# Altium PCB Copy of PCB.PcbDoc
Units mil, origin at the board's own origin, x right, y up, seen from the top; angles counter-clockwise.
Board outline 2615 x 3200 mil, 2 copper layers (Top Layer, Bottom Layer), stack 61.756 mil thick; 29 components, 50 nets, 138 pads, 10 vias.
Unrouted connection lines stored in the file: 13.
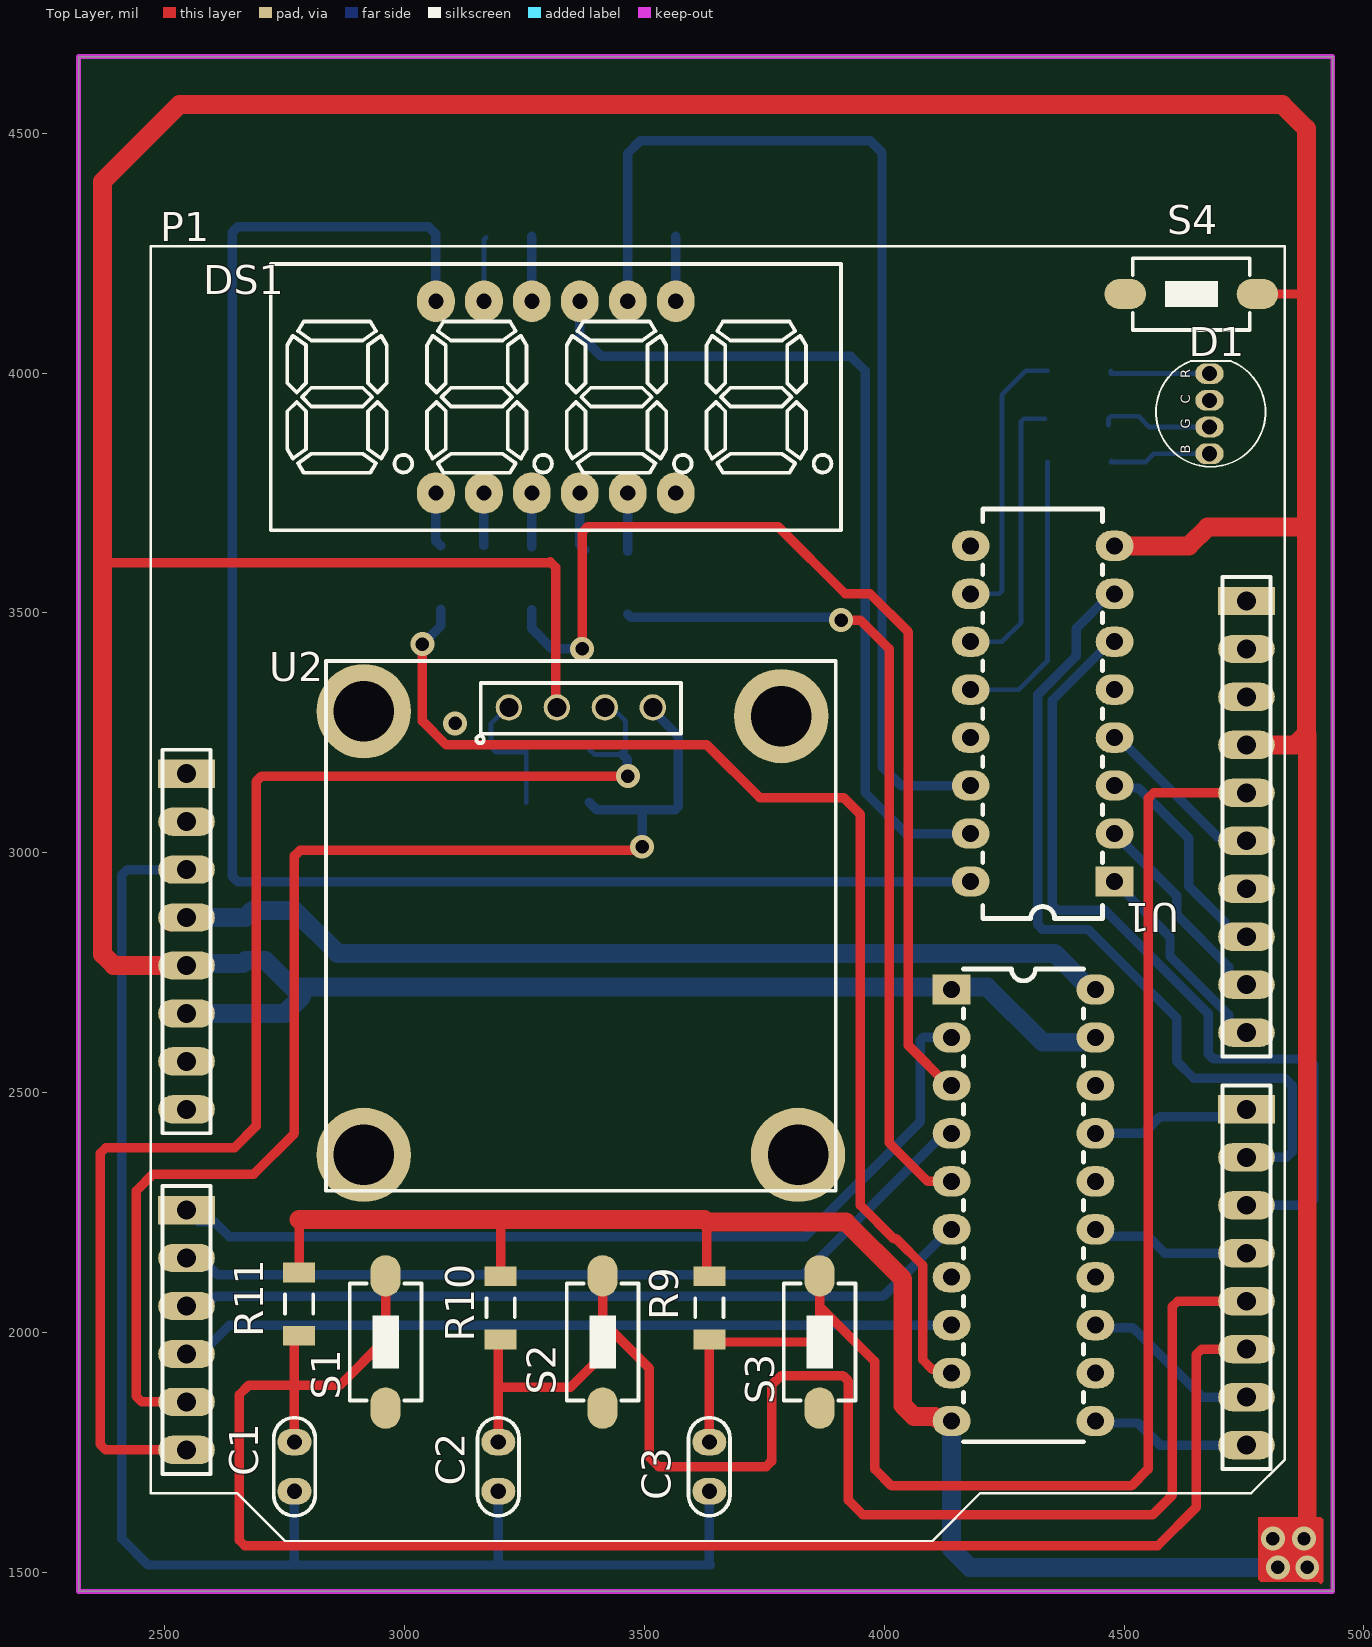
[diagram p0: Top Layer view]
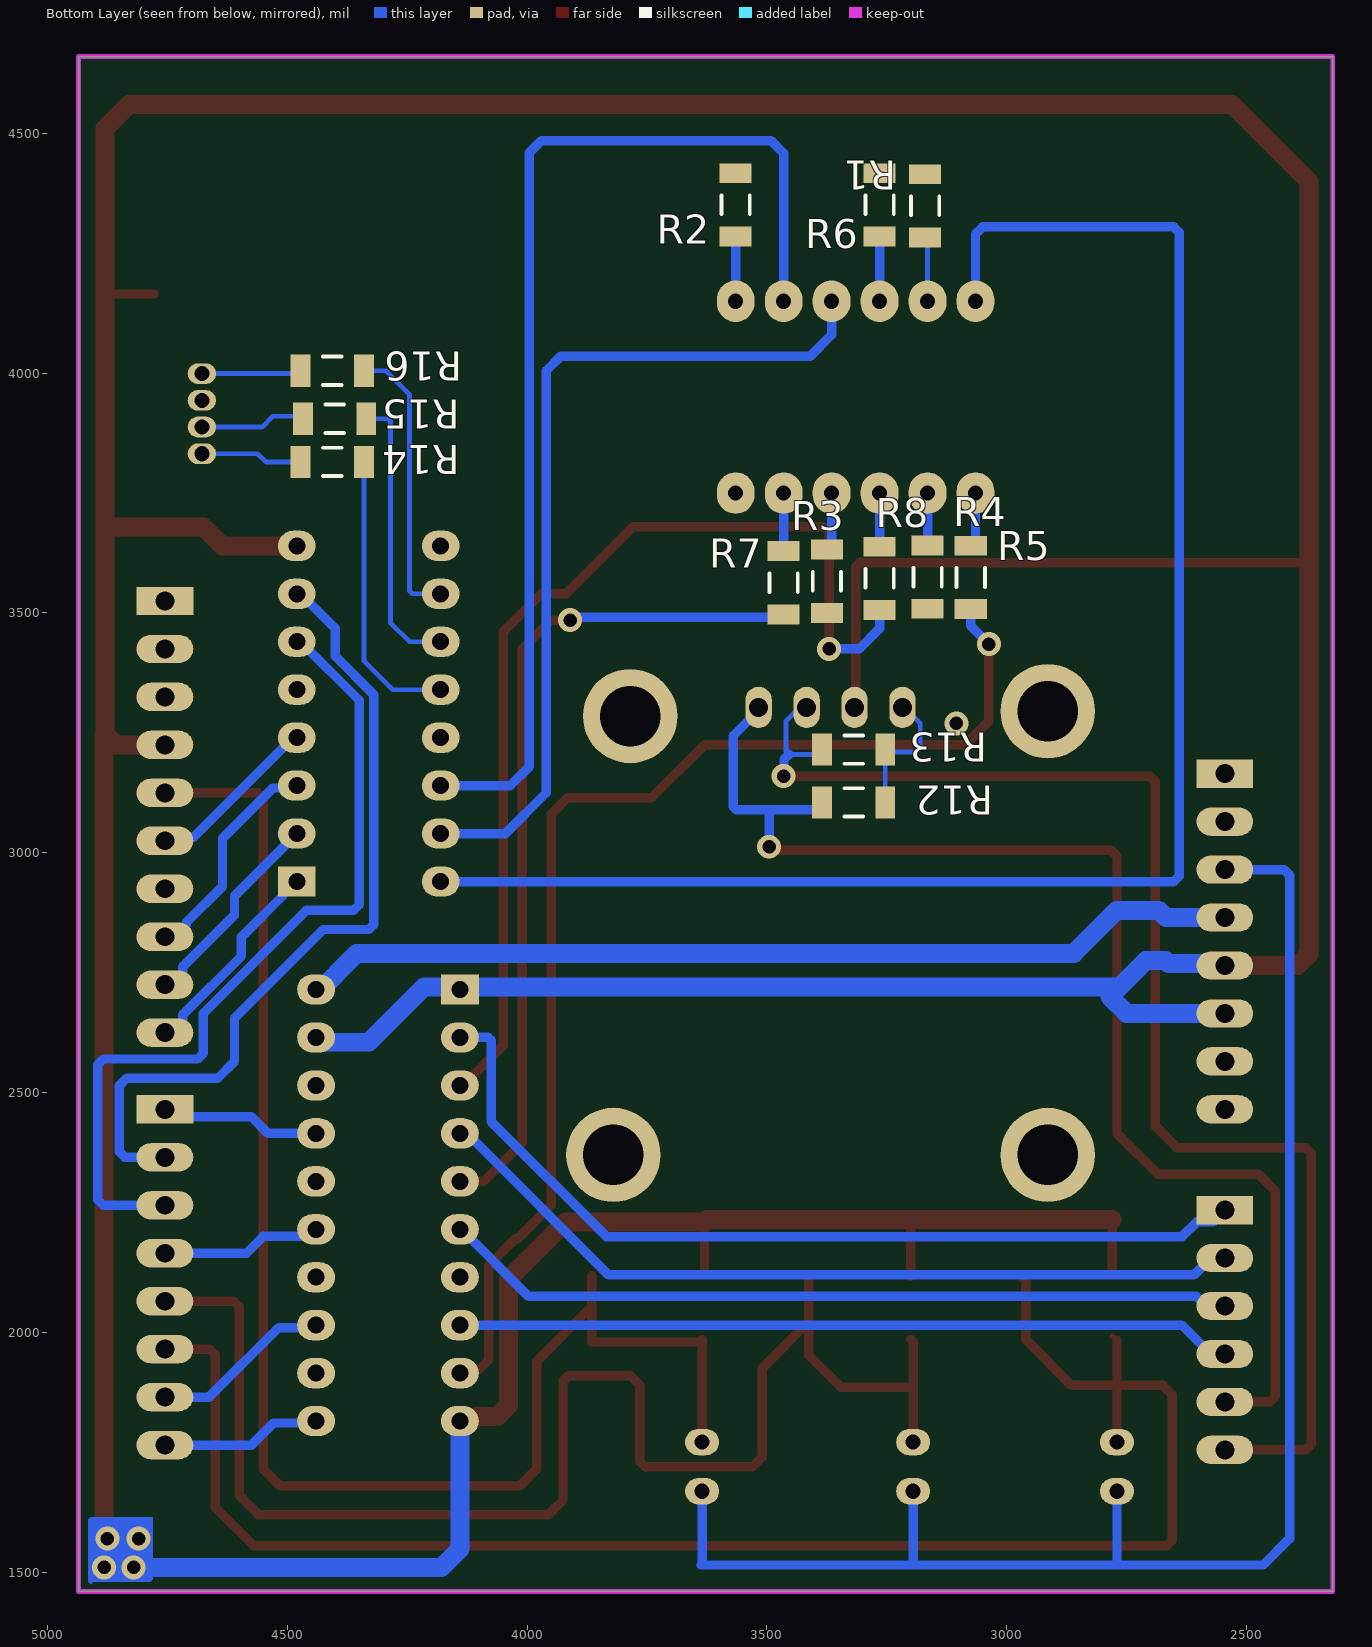
[diagram p1: Bottom Layer view, seen from below]

## Layer stack, top to bottom
Top Solder: solder mask 1, SM-001, Dk 4
Top Layer: signal copper 1.378
Dielectric 1: core 59, Core-043, Dk 4.3
Bottom Layer: signal copper 1.378
Bottom Solder: solder mask 1, SM-001, Dk 4

## Board outline
2320,1460 4935,1460 4935,4660 2320,4660

## Design rules (kind name [scope] priority, off if disabled: settings)
Clearance [All] p1: gap=10 ignorepadtopadclearanceinfootprint=FALSE except(0: Arc-Hole Track-Hole SMDPad-Hole THPad-Hole Via-Hole Fill-Hole Poly-Hole Region-Hole Text-Hole)
PolygonConnect [All] p1: connectstyle=Relief reliefconductorwidth=10 reliefentries=4 polygonreliefangle="90 Angle" airgapwidth=10
RoomDefinition Sheet [InComponentClass('Sheet')] p1: confinementstyle=ConfineIn formatcopy=TRUE lockcomponents=FALSE outline 7045,1060 15695,1060 15695,4125 7045,4125
RoutingVias [All] p1: holewidth=28 width=50 viastyle="Through Hole" minholewidth=28 minwidth=50 maxholewidth=28 maxwidth=50
SolderMaskExpansion [All] p1: expansion=4 istentingtop=FALSE
Width [All] p1: maxlimit=100 minlimit=10 preferedwidth=10
30 further rules are at their usual default settings.

## Classes and differential pairs
component class Sheet: C3 D1 DS1 P1 R1 R2 R3 R4 R5 R6 R7 R8 R9 R10 R11 R12 R13 R14 S1 S2 S3 S4

## Components (designator, comment, footprint, x,y, rotation, side; value= is the part's Value field where it differs from the comment)
C1 "100nF" C_CER_D5 2770,1720 r90 top
C2 "100nF" C_CER_D5 3195,1720 r90 top
C3 "100nF" C_CER_D5 3635,1720 r90 top
D1 "RGB" RGB_DIP 4680,3915 r90 top locked
DS1 "4Digit, Red" 7Seg-MPX4-30.2x14.1mm 3315,3950 r0 top
P1 "UNO" Arduino_uno_U_1 3635,2825 r0 top locked
R1 "470" "RES 1206 (3216X08L)" 3170,4400 r270 bottom value=Value?
R2 "470" "RES 1206 (3216X08L)" 3565,4402.05 r270 bottom value=Value?
R3 "470" "RES 1206 (3216X08L)" 3375,3515 r90 bottom value=Value?
R4 "470" "RES 1206 (3216X08L)" 3165,3523.64 r90 bottom value=Value?
R5 "470" "RES 1206 (3216X08L)" 3075,3522.95 r90 bottom value=Value?
R6 "470" "RES 1206 (3216X08L)" 3265,4402.05 r270 bottom
R7 "470" "RES 1206 (3216X08L)" 3465,3511.95 r90 bottom
R8 "470" "RES 1206 (3216X08L)" 3265,3521.18 r90 bottom
R9 "4.7k" "RES 1206 (3216X08L)" 3635,2000 r90 top
R10 "4.7k" "RES 1206 (3216X08L)" 3200,2000 r90 top
R11 "4.7k" "RES 1206 (3216X08L)" 2779.78,2007.95 r90 top
R12 "4.7k" "RES 1206 (3216X08L)" 3267.95,3105 r0 bottom
R13 "4.7k" "RES 1206 (3216X08L)" 3267.95,3215 r0 bottom
R14 "470" "RES 1206 (3216X08L)" 4355,3815 r0 bottom
R15 "470" "RES 1206 (3216X08L)" 4350,3905 r0 bottom
R16 "470" "RES 1206 (3216X08L)" 4355,4005 r0 bottom
S1 "PB" SW_PB_SMD_2PIN_SPST_6X3X2 2960,1980 r90 top
S2 "PB" SW_PB_SMD_2PIN_SPST_6X3X2 3412.5,1980 r90 top
S3 "PB" SW_PB_SMD_2PIN_SPST_6X3X2 3865,1980 r90 top
S4 "PB" SW_PB_SMD_2PIN_SPST_6X3X2 4640,4165 r180 top locked
U1 "ULN2003" CDIP16 4330,3290 r180 top locked
U2 "OLED_SSD1306" OLED_SSD1306_64_I2C 3367.24,3303.07 r0 top locked
? "74HCT244" PDIP20 4290,2265 r0 top locked

## Footprints (in the part's own frame and the unit in brackets; to place one, negate y for a bottom-side part, rotate by r counter-clockwise, add the part's x,y. Pads: shape width x height; smd on the part's side, far side on the other; paste and mask are expansions set on the pad)
7Seg-MPX4-30.2x14.1mm [mm] "Display, 12-Leads, Body 30/2x14/1mm"
  oval 2x2.2 hole 0.8: 1(-6.35,-5.08) 2(-3.81,-5.08) 3(-1.27,-5.08) 4(1.27,-5.08) 5(3.81,-5.08) 6(6.35,-5.08) 7(6.35,5.08) 8(3.81,5.08) 9(1.27,5.08) 10(-1.27,5.08) 11(-3.81,5.08) 12(-6.35,5.08)
  silkscreen extent -15.1,-7.05 15.1,7.05, body extent -15,-7 15,7, height 7.1
Arduino_uno_U_1 [mm]
  rect 3x1.5 hole 1: 1(-27.686,8.636) 9(-27.686,-14.478) 22(28.448,-9.144) 32(28.448,17.78)
  oval 3x1.5 hole 1: 2(-27.686,6.096) 3(-27.686,3.556) 4(-27.686,1.016) 5(-27.686,-1.524) 6(-27.686,-4.064) 7(-27.686,-6.604) 8(-27.686,-9.144) 10(-27.686,-17.018) 11(-27.686,-19.558) 12(-27.686,-22.098) 13(-27.686,-24.638) 14(-27.686,-27.178) 15(28.448,-26.924) 16(28.448,-24.384) 17(28.448,-21.844) 18(28.448,-19.304) 19(28.448,-16.764) 20(28.448,-14.224) 21(28.448,-11.684) 23(28.448,-5.08) 24(28.448,-2.54) 25(28.448,0) 26(28.448,2.54) 27(28.448,5.08) 28(28.448,7.62) 29(28.448,10.16) 30(28.448,12.7) 31(28.448,15.24)
  silkscreen extent -29.59,-32 30.48,36.58, body extent -28.96,-28.31 29.72,19.05, height 8.51
C_CER_D5 [mm] "CAP, CER, D:5mm, pitch: 2.5mm"
  oval 1.4x1.8 hole 0.8: 1(-1.3,0) 2(1.3,0)
  silkscreen extent -2.6,-1.1 2.6,1.1, body extent -2.46,-1 2.46,1, height 5.45
CDIP16 [mm] "16-Pin Ceramic DIP (DD16) NARROW_(300mil width) - 100mil pitch"
  rect 2x1.6 hole 0.9: 1(-3.81,8.89)
  oval 2x1.6 hole 0.9: 2(-3.81,6.35) 3(-3.81,3.81) 4(-3.81,1.27) 5(-3.81,-1.27) 6(-3.81,-3.81) 7(-3.81,-6.35) 8(-3.81,-8.89) 9(3.81,-8.89) 10(3.81,-6.35) 11(3.81,-3.81) 12(3.81,-1.27) 13(3.81,1.27) 14(3.81,3.81) 15(3.81,6.35) 16(3.81,8.89)
  silkscreen extent -3.18,-10.85 3.18,10.85, body extent -3.93,-10.79 3.94,10.79, height 4
OLED_SSD1306_64_I2C [mm] "OLED SS1306 Breakout, 128X64, I2C"
  round 1.4 / inner round 1.4 / far side oval 1.4x2.2 hole 1 mask+0.1: 1(-3.81,0) 2(-1.27,0) 3(1.27,0) 4(3.81,0)
  round 5 hole 3.2: ""(-11.5,-23.7) ""(-11.5,-0.2) ""(10.611,-0.459) ""(11.5,-23.7)
  silkscreen extent -13.5,-25.6 13.5,2.46, body extent -13.08,-25.74 13.62,2.12, height 13.97
PDIP20 [mm] "20-Pin Plastic DIP (DD20) NARROW_(300mil width) - 100mil pitch"
  rect 2x1.6 hole 0.9: 1(-3.81,11.43)
  oval 2x1.6 hole 0.9: 2(-3.81,8.89) 3(-3.81,6.35) 4(-3.81,3.81) 5(-3.81,1.27) 6(-3.81,-1.27) 7(-3.81,-3.81) 8(-3.81,-6.35) 9(-3.81,-8.89) 10(-3.81,-11.43) 11(3.81,-11.43) 12(3.81,-8.89) 13(3.81,-6.35) 14(3.81,-3.81) 15(3.81,-1.27) 16(3.81,1.27) 17(3.81,3.81) 18(3.81,6.35) 19(3.81,8.89) 20(3.81,11.43)
  silkscreen extent -3.17,-12.52 3.17,12.52, body extent -3.94,-12.51 3.94,12.51, height 3.76
"RES 1206 (3216X08L)" [mm] "Chip Resistor, 2-Leads, Body 3.2x1.6mm, IPC High Density _ (0.125 W)"
  rect 1.05x1.7 smd: 1(-0.377,0) 2(2.973,0)
  silkscreen extent 0.8,-0.75 1.8,0.75, body extent -0.23,-0.76 2.82,0.76, height 0.6
RGB_DIP [mm]
  oval 1.1x1.5 hole 0.8: 1(2.134,0.051) 2(0.72,0.051) 3(-0.694,0.051) 4(-2.108,0.051)
  silkscreen extent -2.8,-2.91 2.8,2.89, body extent -3,-3 2.6,3, height 8.09
SW_PB_SMD_2PIN_SPST_6X3X2 [mm] "SWITCH, PUSHBUTTON, SMD, SPST, 6X3.5X2.5mm, RS-282G05A3, SKQYPA, 50000 Cycles"
  oval 2.2x1.6 smd mask+0.1: 1(-3.5,0) 2(3.5,0)
  silkscreen extent -3.1,-1.9 3.1,1.9, body extent -3.4,-1.86 3.4,1.86, height 2.5

## Part data
C1 C2 C3: library part CAP_THD_CERML, "CAP, THD, CER MULTI LAYER,", ASSEMBLY=ASSEMBLY, DESC="CAP, CER MULTI LAYER,", MANF=MANF, MANF_P#=MANF_PART#, PARAM=50V, PARAM2=PARAM2, PRICE="100= 1$"
D1: library part Semi_LED_RGB_THT, "SMD 5050 LED RGB and Other", Package=Dip, Rating=5V, Inflow=5139, Type=CA, Validation=Valid
DS1: library part ModSen_7Seg_MPX4_Red_CA, "7Segment-MPX4-CA", Package=Package?, Rating=Rating?, Inflow=8134, Type=Type?, Validation=NT
P1: library part Con_Arduino_UNO_U, "Arduino uno up", Package=Package?, Rating=Rating?, Inflow=inflow?, Type=Type?, Validation=Valid
R1 R2 R3 R4 R5 R6 R7 R8 R9 R10 R11 R12 R13 R14 R15 R16: library part Res_SMD_1206, "Resistor", Package=1206, Rating=0.25W, Inflow=inflow?, Type=10%, Validation=Valid
S1 S2 S3 S4: library part SW_PushButton_2_SMD, "SMT Tactile ‎Switch", Package=SMD, Rating=2b, Inflow=8260, Type=Vertical, Validation=Valid
U1: library part IC_Driver_ULN2003, "Seven darlington array drivers", Package=SO-16, Rating=Rating?, Inflow=1506, Type=Driver, Validation=Valid
U2: library part OLED_SSD1306_64_I2C, "OLED, SSD1306, 0.96\", 128X64, BREAKOUT I2C", MANF=-, MANF_P#=OLED_SSD1306_I2C, PARAM="2 Colors, 0.96\", 128X64", PARAM2="3.3/5VCC, -20~70oC"
?: library part IC_Logic_74HCT244, "Octal Bus Buffer with 3 State Outputs (Non Inverted)", Package=Dip, Rating=8b, Inflow=1118, Type="3-State Non-Inverting", Validation=NT

## Via types
v1: diameter 50, hole 28, Top Layer to Bottom Layer, 10 vias

## Nets (pads, with @x,y where several pads share a name; then routed paths per layer and width w, separated by ;. In a path a pad name is that pad's centre, name@x,y a point inside that pad or via, vN(x,y) a via of type N, cw(c..) or ccw(c..) an arc to the next point about the centre after c; other vN are vias at no path point)
3.3: C1.1 C2.1 C3.1 P1.3 R12.1 R13.1 S1.1 S2.1 S3.1 U2.1 | length 3525.3
  Bottom Layer w10: U2.1@3215,3305 3180,3270 3180,3220 3190,3210 3248.11,3210 R13.1 R12.1
  Bottom Layer w19.68: P1.3 2421.53,2965 2410,2953.47 2410,1570 2465,1515 2769.2,1515 ; C1.1 2770,1515.8 2769.2,1515 ; C2.1 3195,1517.73 3192.27,1515 ; C3.1 3635,1516.76 3636.76,1515 3192.27,1515 ; 2769.2,1515 3192.27,1515
+5: ?.20 D1.2 P1.4 | length 2010.8
  Top Layer w39.37: P1.4@2511.71,2855.91 2520.8,2865 P1.4
  Bottom Layer w39.37: P1.4 2667.43,2865 2682.43,2880 2770,2880 2860,2790 4355,2790 ?.20@4440,2705
digit1: P1.27 U1.4 | length 364.1
  Bottom Layer w19.68: U1.4 4487.87,3240 4695.34,3032.53 4747.47,3032.53 P1.27
digit2: P1.25 U1.3 | length 466.3
  Bottom Layer w19.68: U1.3 4484.9,3135.1 4529.9,3135.1 4635,3030 4635,2930 4710.66,2854.34 4710.66,2850.46 4736.13,2825 P1.25
digit3: P1.24 U1.2 | length 439.8
  Bottom Layer w19.68: U1.2 4610,2910 4610,2870 4718.16,2761.84 4718.16,2743.19 4736.35,2725 P1.24
digit4: P1.23 U1.1 | length 444.4
  Bottom Layer w19.68: U1.1 4500,2920 4507.87,2920 4509.53,2918.35 4509.53,2910.47 4595.57,2824.43 4595.57,2784.43 4718.16,2661.84 4718.16,2643.19 4736.35,2625 P1.23
GND: ?.1 ?.10 ?.19 P1.5 P1.6 P1.29 R9.2 R10.2 R11.2 S4.1 U1.8 U2.2 | length 14595.5
  Top Layer w10: R9.2@3630,2122.05 R9.2
  Top Layer w19.68: 2370,3606.06 2371.06,3605 3303.47,3605 ; R11.2 2779.78,2235.22 ; R10.2 3200,2235.22 3200,2235.54 3200,2238.45 ; 3303.47,3606.53 3315,3595 ; U2.2@3315,3303.07 3315,3593.47 ; R9.2@3630,2122.05 3630,2230 ; S4.1 4878.51,4165 4880,4166.49
  Top Layer w39.37: P1.5 2393.06,2765 2370,2788.06 2370,3606.06 2370,4400 2530,4560 4830,4560 4880,4510 4880,4166.49 4880,3678.98 ; 2779.78,2235.22 3200,2235.22 ; 3200,2235.54 3624.46,2235.54 3630,2230 3920,2230 4038.41,2111.59 4038.41,1848.06 4061.48,1825 4105.42,1825 4110.9,1819.52 4135.48,1819.52 ?.10 ; U1.8 4635,3640 4673.98,3678.98 4880,3678.98 ; P1.29 4856.94,3225 4880,3248.06 ; v1(4881.72,1510) 4881.72,3246.34 4880,3248.06 ; 4880,3248.06 4880,3678.98
  Bottom Layer w39.37: P1.6 2750,2665 2785,2700 2765,2720 ; P1.5 2548.77,2768.77 2662.36,2768.77 2668.59,2775 2710,2775 2765,2720 ; ?.10 4140,1548.06 4178.06,1510 v1(4820.26,1510) v1(4881.72,1510) ; ?.19@4435,2605 4330,2605 4215,2720 2765,2720
  other v1: 4810,1570 4875,1570
Net_3: ?.3 R8.1 | length 2167.2
  Top Layer w19.68: v1(3370,3425) 3370,3668.47 3381.53,3680 3778.47,3680 3918.47,3540 3970,3540 4050,3460 4050,2598.18 4133.18,2515 ?.3
  Bottom Layer w19.68: R8.1 3265,3467.3 3307.3,3425 v1(3370,3425)
Net_5: ?.5 R7.1 | length 1768
  Top Layer w19.68: v1(3910,3485) 3950,3485 4010,3425 4010,2395 4090,2315 ?.5
  Bottom Layer w19.68: R7.1 3471.31,3490.8 3904.2,3490.8 v1(3910,3485)
Net_7: ?.7 R6.1
Net_9: ?.9 R5.1 | length 2508.4
  Top Layer w19.68: v1(3036.92,3435) 3036.92,3274.66 3086.58,3225 3630,3225 3740,3115 3915,3115 3950,3080 3950,2265 4020,2195 4025,2195 4080,2140 4080,1942.87 4099.58,1923.29 4131.71,1923.29 ?.9
  Bottom Layer w19.68: v1(3036.92,3435) 3075,3473.08 R5.1
Net_12: ?.12 R4.1
Net_14: ?.14 R3.1
Net_16: ?.16 R2.1
Net_18: ?.18 R1.1
NetD1_1: D1.1 R16.2 | length 211.6
  Bottom Layer w10: R16.2 4472.05,3999.67 4472.72,3999 D1.1
NetD1_3: D1.3 R15.2 | length 235.1
  Bottom Layer w10: R15.2@4467.05,3892.2 R15.2 4472.05,3910 4530,3910 4552.33,3887.67 D1.3
NetD1_4: D1.4 R14.2 | length 215.8
  Bottom Layer w10: R14.2@4474.05,3817 R14.2 4545,3815 4562,3832 D1.4
NetDS1_1: DS1.1 R5.2 | length 121.2
  Bottom Layer w19.68: DS1.1 3060,3750 3065,3745 3065,3650 R5.2
NetDS1_2: DS1.2 R4.2 | length 109.3
  Bottom Layer w19.68: R4.2 DS1.2
NetDS1_3: DS1.3 R8.2 | length 111.8
  Bottom Layer w19.68: R8.2 DS1.3
NetDS1_4: DS1.4 R3.2 | length 122.1
  Bottom Layer w19.68: DS1.4 3365,3642.05 R3.2
NetDS1_5: DS1.5 R7.2 | length 121
  Bottom Layer w19.68: R7.2 DS1.5
NetDS1_6: DS1.6 U1.13
NetDS1_7: DS1.7 R2.2 | length 135
  Bottom Layer w19.68: DS1.7 R2.2
NetDS1_8: DS1.8 U1.14 | length 2341.4
  Bottom Layer w19.68: DS1.8 3465,4458.47 3491.53,4485 3970,4485 3995,4460 3995,3180 4035,3140 U1.14
NetDS1_9: DS1.9 U1.15 | length 1831.3
  Bottom Layer w19.68: DS1.9 3365,4080 3410,4035 3930,4035 3960,4005 3960,3125 4045,3040 U1.15
NetDS1_10: DS1.10 R6.2 | length 135
  Bottom Layer w19.68: DS1.10 R6.2
NetDS1_11: DS1.11 R1.2 | length 135
  Bottom Layer w10: DS1.11 3165,4277.95 R1.2
NetDS1_12: DS1.12 U1.16 | length 3462.7
  Bottom Layer w19.68: DS1.12 3065,4290 3050,4305 2651.53,4305 2640,4293.47 2640,2951.53 2651.53,2940 U1.16
NetR14_1: R14.1 U1.12 | length 607
  Bottom Layer w10: U1.12@4185,3335 U1.12 4280,3340 4340.16,3400.16 R14.1
NetR15_1: R15.1 U1.11 | length 593.3
  Bottom Layer w10: U1.11 4245,3440 4285,3480 4285,3899.14 4290.86,3905 R15.1
NetR16_1: R16.1 U1.10 | length 592.4
  Bottom Layer w10: U1.10 4239.14,3540 4245,3545.86 4245,3955 4295,4005 R16.1
reset: P1.2 S4.2
RGBB: P1.26 U1.5
RGBG: P1.21 U1.7 | length 1720.6
  Bottom Layer w19.68: U1.7 4472.13,3540 4400,3467.87 4400,3410 4320,3330 4320,2850 4330,2840 4425,2840 4610,2655 4610,2565 4645,2530 4835,2530 4850,2515 4850,2376.53 4838.47,2365 P1.21
RGBR: P1.20 U1.6 | length 1765.5
  Bottom Layer w19.68: U1.6 4472.13,3440 4350,3317.87 4350,2891.53 4361.53,2880 4460,2880 4675,2665 4675,2581.53 4686.53,2570 4883.47,2570 4895,2558.47 4895,2276.53 4883.47,2265 P1.20
scl: P1.14 R13.2 U2.3 | length 2897.2
  Top Layer w19.68: P1.14 2376.53,1755 2365,1766.53 2365,2373.47 2376.53,2385 2645,2385 2690,2430 2690,3148.47 2701.53,3160 v1(3465,3160)
  Bottom Layer w10: R13.2 3395,3205 3454.14,3205 3460,3210.86 3460,3275 U2.3@3415,3320
  Bottom Layer w19.68: 3454.14,3205 3464.26,3194.89 3464.26,3160.74 v1(3465,3160)
sda: P1.13 R12.2 U2.4 | length 2740.7
  Top Layer w19.68: P1.13 2451.53,1855 2440,1866.53 2440,2295 2475,2330 2685,2330 2770,2415 2770,2993.47 2781.53,3005 3500,3005 3499.91,3005.09 3499.91,3012.57 v1(3495.12,3012.57)
  Bottom Layer w19.68: R12.2 3400,3090 3495.12,3090 ; v1(3495.12,3012.57) 3495.12,3090 ; U2.4@3515,3299.15 3570,3244.15 3570,3095.86 3564.14,3090 3495.12,3090
seg1: ?.2 P1.9 | length 1891.4
  Bottom Layer w19.68: P1.9 2569.53,2230.47 2603.37,2230.47 2634.18,2199.66 3834.66,2199.66 4075,2440 4075,2609.14 4080.86,2615 ?.2 ?.2@4140,2612.65
seg2: ?.4 P1.10 | length 1716.7
  Bottom Layer w10: ?.4 ?.4@4148.75,2406.25
  Bottom Layer w19.68: P1.10 2574.53,2155 2609.53,2120 3830,2120 ?.4@4116.25,2406.25
seg3: ?.6 P1.11 | length 1661.3
  Bottom Layer w19.68: P1.11 2584.91,2055 2604.91,2075 3996.85,2075 4136.85,2215 ?.6
seg4: ?.8 P1.12 | length 1619.9
  Bottom Layer w19.68: P1.12 2574.53,1955 2634.53,2015 ?.8
seg5: ?.11 P1.15 | length 335.7
  Bottom Layer w19.68: ?.11 4443.9,1811.1 4528.49,1811.1 4529.8,1809.8 4574.59,1765 P1.15
seg6: ?.13 P1.16 | length 377.1
  Bottom Layer w19.68: ?.13 4445,2010 4517.87,2010 4662.87,1865 P1.16
seg7: ?.15 P1.19 | length 332.8
  Bottom Layer w19.68: ?.15@4445,2220 4465,2200 4550,2200 4585,2165 P1.19
seg8: ?.17 P1.22 | length 335.7
  Bottom Layer w19.68: ?.17 4540,2415 4575,2450 4740,2450 P1.22
sw1: C1.2 P1.17 R11.1 S1.2 | length 3481.7
  Top Layer w10: R11.1@2770,1983.33 R11.1 R11.1@2780.87,1992.02 ; S1.2 S1.2@2965,2112.8
  Top Layer w19.68: C1.2 2770,1889.51 ; R11.1@2770,1983.33 2770,1889.51 ; S1.2@2965,2112.8 2960,2107.8 2960,1985 2864.51,1889.51 2770,1889.51 ; P1.17 4661.53,1965 4650,1953.47 4650,1635 4570,1555 2666.53,1555 2655,1566.53 2655,1870 2674.51,1889.51 2770,1889.51
sw2: C2.2 P1.18 R10.1 S2.2 | length 3058.5
  Top Layer w19.68: C2.2 3195,1885.52 ; R10.1 3195,1980.16 3195,1885.52 ; S2.2@3410,2115.3 S2.2 3412.5,2022.5 ; P1.18 4611.53,2065 4600,2053.47 4600,1660 4560,1620 3955,1620 3925,1650 3925,1898.47 3913.47,1910 3785,1910 3765,1890 3765,1731.53 3753.47,1720 3529.68,1720 3510,1739.68 3510,1925 3412.5,2022.5 ; 3195,1885.52 3345.52,1885.52 3412.5,1952.5 3412.5,2022.5
sw3: C3.2 P1.28 R9.1 S3.2 | length 3185.3
  Top Layer w10: P1.28@4750,3125 4755,3130 P1.28
  Top Layer w19.68: C3.2 R9.1 3640.16,1980 3865,1980 3865,2054.41 ; S3.2 3865,2054.41 ; P1.28@4750,3125 4561.53,3125 4550,3113.47 4550,1715 4515,1680 4015,1680 3980,1715 3980,1939.41 3865,2054.41
pads on no net: P1.1 P1.7 P1.8 P1.30 P1.31 P1.32 U1.9 U2.
copper on no net:
  other v1: 3105,3270

## Keep-outs
Keep-Out Layer:
  the board outline again, w10

## Other copper
Top Layer:
  region net GND: 4780,1615 4780,1485 4785,1480 4905,1480 4910,1475 4915,1480 4915,1610 4910,1615
Bottom Layer:
  region net GND: 4780,1615 4780,1485 4785,1480 4905,1480 4910,1475 4915,1480 4915,1610 4910,1615
  region: 4810,1610

## Text inside footprints (layer, text, board x,y; h text height)
D1: Top Overlay "B" at 4638,3832 h19.68 r90; Top Overlay "G" at 4638,3884.33 h19.68 r90; Top Overlay "C" at 4638,3936.67 h19.68 r90; Top Overlay "R" at 4638,3989 h19.68 r90